# EAGLE board IR_beacon.b#11 (EAGLE 9.4.2)
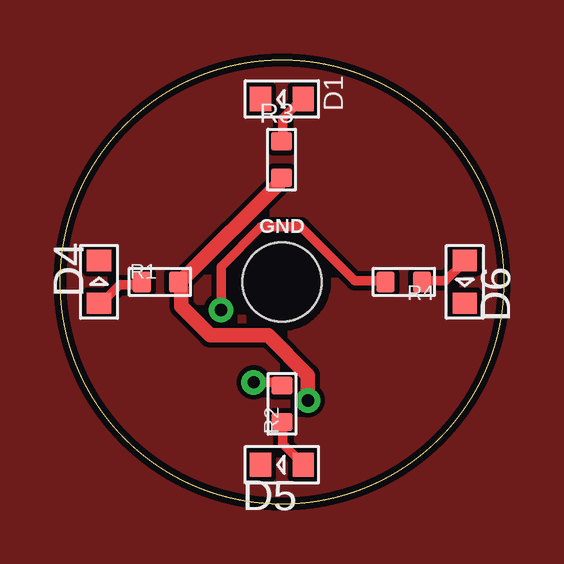
[diagram p0: board, top side]
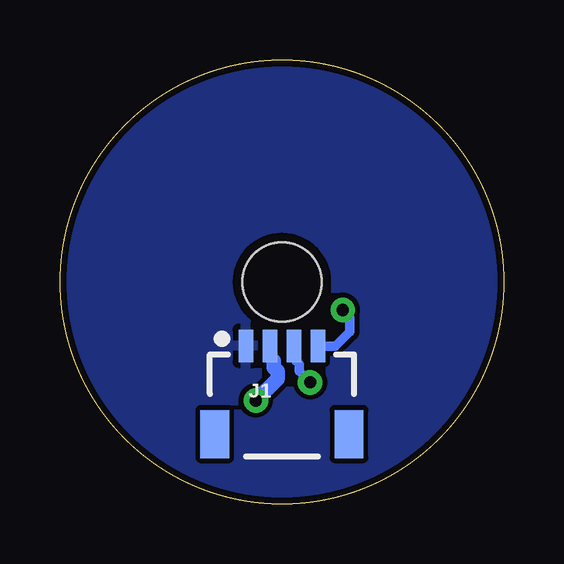
[diagram p1: board, bottom side, seen from below]

Size 18.49 x 18.49 mm. Coordinates in mm from the lower left corner, seen from the top.
Outline: circle at 9.25,9.25 radius 9.25
Copper layers (1*16): Top 0.035mm / dielectric 1.5mm / Bottom 0.035mm
Design rules "SparkFun": minimum track width 8mil, minimum drill 20mil, track to track 8mil, track to pad 8mil, pad to pad 8mil, via to via 8mil, smd to smd 8mil, copper to edge 10mil, drill to drill 8mil, minimum pad ring 12mil, minimum via ring 10mil, stop-mask expansion 4mil, vias tented up to drill 25mil, thermal gap 10mil
Net classes: 0 default: width 0.4 mm, clearance 0.2 mm; 1 5v: width 0.6 mm, clearance 0.2 mm

## Footprints (pad centres in the part's own frame; a part is rotated, then mirrored left to right if it is on the bottom)
LED0603 = smd 0.889 x 1.016: 1 -0.889,0; 2 0.889,0
STAND-OFF = hole 3.302: 0,0
1X04_1MM_RA = smd 0.6 x 1.35: 1 -1.5,0; 2 -0.5,0; 3 0.5,0; 4 1.5,0 | smd 1.2 x 2: NC1 2.8,-3.675; NC2 -2.8,-3.675
0603_S = smd 0.762 x 0.889: 1 -0.762,0; 2 0.762,0

## Placement (x,y rotation side)
D1  red  [LED0603]  9.25,16.87 180 top
D4  IR LED  [LED0603]  1.63,9.25 90 top
D5  IR LED  [LED0603]  9.25,1.63 180 top
D6  IR LED  [LED0603]  16.87,9.25 270 top
GND  STAND-OFF  [STAND-OFF]  9.25,9.25 0 top
J1  [1X04_1MM_RA]  9.25,6.58 0 bottom
R1  150  [0603_S]  4.17,9.25 0 top
R2  150  [0603_S]  9.25,4.17 90 top
R3  150  [0603_S]  9.23,14.34 270 top
R4  150  [0603_S]  14.33,9.25 180 top
U$2  [ZHDK_LOGO]  55.28,-11 0 top  (outside the outline)

## Library data of the parts
D1 D4-D6 R1-R4 = Discrete
GND = SparkFun-Hardware
J1 = SparkFun-Connectors; PROD_ID: CONN-13694
U$2 = IAD_GRAPHIC

## Nets
3.3V [5v]: J1.2 R1.2 R3.2
GND: J1.1
N$1: J1.4 R4.2
N$2: D1.1 R3.1
N$3: D5.1 R2.1
N$4: D4.1 R1.1
N$5: D6.1 R4.1
N$6: J1.3 R2.2

## Tracks (layer width: path | path; a pad name or v marks a point on that pad's centre or on a via)
3.3V  (via drill 0.51)
  Top 0.6: R3.2 9.27,13.51 5.05,9.28 R1.2 5.05,8.98 5.05,8.23 6.26,7.02 8.67,7.02 10.33,5.36 v10.33,4.31
  Bottom 0.6: v10.33,4.31 9.43,5.21 9.43,5.51 9.58,5.66 9.58,5.97 9.73,6.12 9.73,6.57 J1.2
GND
  pour Top (isolate 0.1): -6.01,21.71 24.45,21.71 24.45,-3.47 -6.01,-3.47
  pour Bottom (isolate 0.1): -26.47,31.89 46,31.89 46,-13.12 -26.47,-13.12
N$1  (via drill 0.51)
  Top 0.4: v6.71,8.08 6.71,9.89 8.37,11.55 10.03,11.55 12.29,9.28 13.5,9.28 R4.2
  Bottom 0.4: v6.71,8.08 6.41,7.78 6.41,7.17 7.01,6.57 7.62,6.57 J1.4
N$2
  Top 0.4: R3.1 9.27,15.16 9.27,16.07 10.03,16.82 D1.1
N$3
  Top 0.4: R2.1 9.27,3.4 9.27,2.5 10.03,1.74 D5.1
N$4
  Top 0.4: R1.1 3.39,9.13 2.49,9.13 1.73,8.38 D4.1
N$5
  Top 0.4: R4.1 15.16,9.28 16.06,9.28 16.81,10.04 D6.1
N$6  (via drill 0.51)
  Top 0.4: v8.07,5.06 9.12,5.06 R2.2
  Bottom 0.4: v8.07,5.06 8.52,5.51 8.52,5.82 8.67,5.97 8.67,6.57 J1.3

## Text on the board
tPlace: L.Franzke 2019